# Altium PCB POWER_SUPPLY.PcbDoc (part 2 of 5)
Units mm, origin at the board's own origin, x right, y up, seen from the top; angles counter-clockwise.
Board outline 115 x 115 mm, 2 copper layers (Top Layer, Bottom Layer), stack 1.58 mm thick; 91 components, 48 nets, 207 pads, 26 vias.
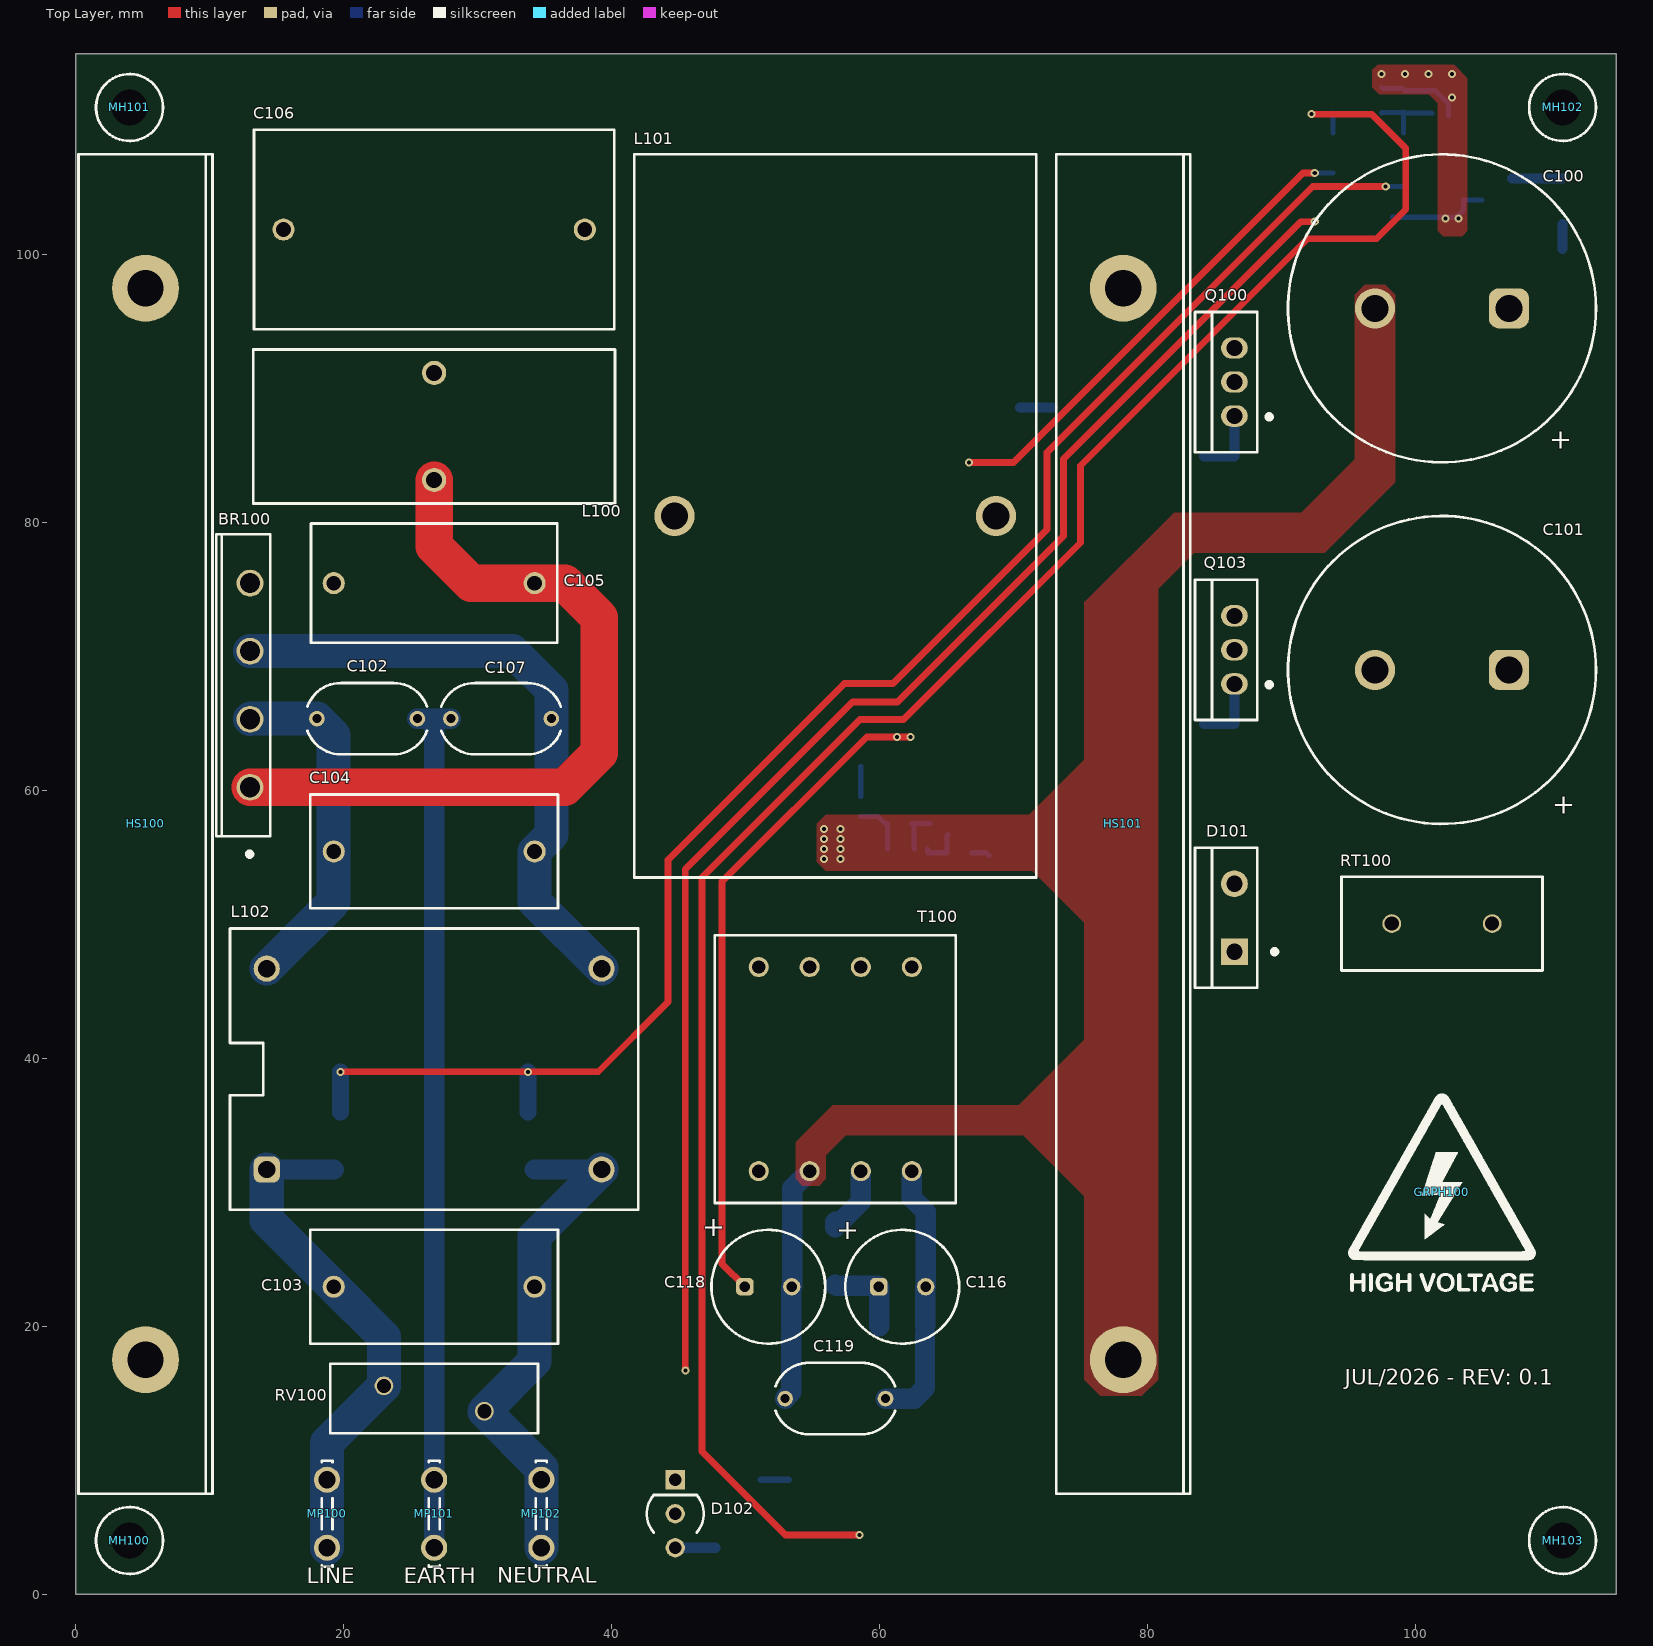
[diagram p0: Top Layer view]

## Part data (continued)
D101: "DIODE STD 600V 8A TO220AC INS", Average Rectified Current=8A, Case/Package=TO-220-2, Forward Voltage=2.4V, Manufacturer=STMicroelectronics, Max Forward Surge Current (Ifsm)=180A, Max Junction Temperature (Tj)=150°C, Max Repetitive Reverse Voltage (Vrrm)=600V, Min Operating Temperature=-65°C, Peak Reverse Current=10µA, Supplier Part Number=497-3250-5-ND, Category="Rectifier Diodes", China RoHS=Non-Compliant, ComponentLink1Description=https://datasheet.octopart.com:443/STTH806DTI-STMicroelectronics-datasheet-8805855.pdf?src-supplier=Newark, ComponentLink1URL=https://datasheet.octopart.com:443/STTH806DTI-STMicroelectronics-datasheet-8805855.pdf?src-supplier=Newark, ComponentLink2Description=https://datasheet.octopart.com:443/STTH806DTI-STMicroelectronics-datasheet-33008909.pdf?src-supplier=Farnell, ComponentLink2URL=https://datasheet.octopart.com:443/STTH806DTI-STMicroelectronics-datasheet-33008909.pdf?src-supplier=Farnell, ComponentLink3Description=https://datasheet.octopart.com:443/STTH806DTI-STMicroelectronics-datasheet-148320.pdf?src-supplier=Verical, ComponentLink3URL=https://datasheet.octopart.com:443/STTH806DTI-STMicroelectronics-datasheet-148320.pdf?src-supplier=Verical, ComponentLink4Description=https://datasheet.octopart.com:443/STTH806DTI-STMicroelectronics-datasheet-68141.pdf?src-supplier=Mouser, ComponentLink4URL=https://datasheet.octopart.com:443/STTH806DTI-STMicroelectronics-datasheet-68141.pdf?src-supplier=Mouser, ComponentLink5Description=https://datasheet.octopart.com:443/STTH806DTI-STMicroelectronics-datasheet-14054847.pdf?src-supplier=iiiC, ComponentLink5URL=https://datasheet.octopart.com:443/STTH806DTI-STMicroelectronics-datasheet-14054847.pdf?src-supplier=iiiC, Country of Origin="Mainland China", Current Rating=8A, Element Configuration=Single, Export Control Classification Number (ECCN) Code=EAR99, Forward Current=8A, Harmonized Tariff Schedule (HTS) Code=8541.10.00.80, Height=9.3mm, Introduction Date=1980-01-04, Lead Free="Lead Free", Length=10.4mm, Lifecycle Status=Production, Manufacturer Part Number=STTH806DTI, Max Operating Temperature=150°C, Max Output current=8A, Max Reverse Voltage (DC)=600V, Max Surge Current=180A, Mounting Technology="Through Hole", Number of Elements=1, Number of Terminals=2, Output Current=8A, Peak Non-Repetitive Surge Current=180A, Pins=2, Polarity=Standard, Pricing="1=2.08, 50=0.861, 100=0.8408, 500=0.78042, 1000=0.74288 (USD)", Radiation Hardening=No, REACH SVHC=No, Recovery Time=30ns, Reverse Recovery Time=30ns, Reverse Standoff Voltage=600V, Reverse Voltage=600V, RoHS=Compliant, Stock=1037, Supplier=DigiKey, Voltage Rating (DC)=600V, Width=4.6mm
D102: library part SSL-LX3059IGW-CA, "LED GREEN/RED DIFF T-3MM TRI T/H", Case/Package=Radial, Color="Green, Red", Forward Current=30mA, Forward Voltage=2.2V, Manufacturer=Lumex, Max Operating Temperature=85°C, Min Operating Temperature=-40°C, Power Dissipation=105mW, Reverse Voltage=5V, Supplier Part Number=67-2307-ND, Category=LEDs, China RoHS=Compliant, ComponentLink1Description=https://datasheet.octopart.com:443/SSL-LX3059IGW-CA-Lumex-datasheet-158669.pdf?src-supplier=IHS, ComponentLink1URL=https://datasheet.octopart.com:443/SSL-LX3059IGW-CA-Lumex-datasheet-158669.pdf?src-supplier=IHS, ComponentLink2Description=https://datasheet.octopart.com:443/SSL-LX3059IGW-CA-Lumex-datasheet-12552074.pdf?src-supplier=Future+Electronics, ComponentLink2URL=https://datasheet.octopart.com:443/SSL-LX3059IGW-CA-Lumex-datasheet-12552074.pdf?src-supplier=Future+Electronics, Country of Origin="Mainland China", Export Control Classification Number (ECCN) Code=EAR99, Harmonized Tariff Schedule (HTS) Code=8541.40.20.00, Height=5mm, Illumination Color="Green, Red", Introduction Date=2001-01-30, Lead Free="Lead Free", Lens Style="Colorless, Diffused, Dome", Lifecycle Status=Production, Luminous Intensity=30mcd, Manufacturer Part Number=SSL-LX3059IGW-CA, Mounting Technology="Through Hole", Number of Circuits=1, Number of LEDs=2, Number of Terminals=3, Packaging=Bulk, Pins=3, Pricing="1=0.53, 10=0.365, 100=0.2624, 500=0.21602, 1000=0.20076, 2000=0.18779, 5000=0.17358, 10000=0.16471, 25000=0.15504 (USD)", REACH SVHC=Yes, RoHS=Compliant, Schedule B="8541402000, 8541402000|8541402000, 8541402000|8541402000|8541402000, 8541402000|8541402000|8541402000|8541402000", Shape=Round, Stock=91547, Supplier=DigiKey, Terminal Pitch=2.54mm, Viewing Angle=60°, Wavelength=635nm
D103 D104: "DIODE STANDARD 1000V 1A DO214AC", Average Rectified Current=1A, Case/Package=SMA, Forward Voltage=1.1V, Manufacturer=onsemi, Manufacturer Lifecycle Status=ACTIVE, Max Forward Surge Current (Ifsm)=30A, Max Junction Temperature (Tj)=150°C, Max Power Dissipation=1.4W, Max Repetitive Reverse Voltage (Vrrm)=1kV, Max Surge Current=40A, Min Operating Temperature=-55°C, Peak Reverse Current=1µA, Supplier Part Number=S1MFSCT-ND, Category="Rectifier Diodes", China RoHS=Non-Compliant, ComponentLink1Description=https://datasheet.octopart.com:443/S1M-ON-Semiconductor-datasheet-137256442.pdf?src-supplier=Upverter, ComponentLink1URL=https://datasheet.octopart.com:443/S1M-ON-Semiconductor-datasheet-137256442.pdf?src-supplier=Upverter, ComponentLink2Description=https://sigma.octopart.com:443/138897407/technical_drawing/ON-Semiconductor-S1M.pdf?src-supplier=Upverter, ComponentLink2URL=https://sigma.octopart.com:443/138897407/technical_drawing/ON-Semiconductor-S1M.pdf?src-supplier=Upverter, ComponentLink3Description=https://datasheet.octopart.com:443/S1M-ON-Semiconductor-datasheet-155242966.pdf?src-supplier=onsemi, ComponentLink3URL=https://datasheet.octopart.com:443/S1M-ON-Semiconductor-datasheet-155242966.pdf?src-supplier=onsemi, ComponentLink4Description=https://datasheet.octopart.com:443/S1M-ON-Semiconductor-datasheet-81638276.pdf?src-supplier=onsemi, ComponentLink4URL=https://datasheet.octopart.com:443/S1M-ON-Semiconductor-datasheet-81638276.pdf?src-supplier=onsemi, ComponentLink5Description=https://datasheet.octopart.com:443/S1M-ON-Semiconductor-datasheet-86698603.pdf?src-supplier=onsemi, ComponentLink5URL=https://datasheet.octopart.com:443/S1M-ON-Semiconductor-datasheet-86698603.pdf?src-supplier=onsemi, ComponentLink6Description=https://datasheet.octopart.com:443/S1M-ON-Semiconductor-datasheet-21199496.pdf?src-supplier=Future+Electronics, ComponentLink6URL=https://datasheet.octopart.com:443/S1M-ON-Semiconductor-datasheet-21199496.pdf?src-supplier=Future+Electronics, ComponentLink7Description=https://datasheet.octopart.com:443/S1M-Fairchild-Semiconductor-datasheet-42431463.pdf?src-supplier=IHS, ComponentLink7URL=https://datasheet.octopart.com:443/S1M-Fairchild-Semiconductor-datasheet-42431463.pdf?src-supplier=IHS, ComponentLink8Description=https://datasheet.octopart.com:443/S1M-onsemi-datasheet-180969538.pdf?src-supplier=IHS, ComponentLink8URL=https://datasheet.octopart.com:443/S1M-onsemi-datasheet-180969538.pdf?src-supplier=IHS, ComponentLink9Description=https://datasheet.octopart.com:443/S1M-onsemi-datasheet-181265944.pdf?src-supplier=IHS, ComponentLink9URL=https://datasheet.octopart.com:443/S1M-onsemi-datasheet-181265944.pdf?src-supplier=IHS, ComponentLink10Description=https://datasheet.octopart.com:443/S1M-ON-Semiconductor-datasheet-86692978.pdf?src-supplier=Farnell, ComponentLink10URL=https://datasheet.octopart.com:443/S1M-ON-Semiconductor-datasheet-86692978.pdf?src-supplier=Farnell, ComponentLink11Description=https://datasheet.octopart.com:443/S1M-Fairchild-Semiconductor-datasheet-68341913.pdf?src-supplier=Farnell, ComponentLink11URL=https://datasheet.octopart.com:443/S1M-Fairchild-Semiconductor-datasheet-68341913.pdf?src-supplier=Farnell, ComponentLink12Description=https://datasheet.octopart.com:443/S1M.-Fairchild-Semiconductor-datasheet-2355.pdf?src-supplier=Fairchild+Semiconductor, ComponentLink12URL=https://datasheet.octopart.com:443/S1M.-Fairchild-Semiconductor-datasheet-2355.pdf?src-supplier=Fairchild+Semiconductor, ComponentLink13Description=https://sigma.octopart.com:443/17345279/technical_drawing/Fairchild-Semiconductor-S1M..pdf?src-supplier=Fairchild+Semiconductor, ComponentLink13URL=https://sigma.octopart.com:443/17345279/technical_drawing/Fairchild-Semiconductor-S1M..pdf?src-supplier=Fairchild+Semiconductor, ComponentLink14Description=https://datasheet.octopart.com:443/S1M-Fairchild-Semiconductor-datasheet-67132006.pdf?src-supplier=element14+APAC, ComponentLink14URL=https://datasheet.octopart.com:443/S1M-Fairchild-Semiconductor-datasheet-67132006.pdf?src-supplier=element14+APAC, ComponentLink15Description=https://datasheet.octopart.com:443/S1M-Fairchild-Semiconductor-datasheet-68457125.pdf?src-supplier=element14+APAC, ComponentLink15URL=https://datasheet.octopart.com:443/S1M-Fairchild-Semiconductor-datasheet-68457125.pdf?src-supplier=element14+APAC, ComponentLink16Description=https://datasheet.octopart.com:443/S1M.-Fairchild-Semiconductor-datasheet-8621163.pdf?src-supplier=_legacy+Avnet, ComponentLink16URL=https://datasheet.octopart.com:443/S1M.-Fairchild-Semiconductor-datasheet-8621163.pdf?src-supplier=_legacy+Avnet, ComponentLink17Description=https://datasheet.octopart.com:443/S1M.-Fairchild-Semiconductor-datasheet-17703433.pdf?src-supplier=Jameco, ComponentLink17URL=https://datasheet.octopart.com:443/S1M.-Fairchild-Semiconductor-datasheet-17703433.pdf?src-supplier=Jameco, ComponentLink18Description=https://datasheet.octopart.com:443/S1M-ON-Semiconductor-datasheet-81455056.pdf?src-supplier=TME, ComponentLink18URL=https://datasheet.octopart.com:443/S1M-ON-Semiconductor-datasheet-81455056.pdf?src-supplier=TME, ComponentLink19Description=https://datasheet.octopart.com:443/S1M-Fairchild-Semiconductor-datasheet-67356299.pdf?src-supplier=Newark, ComponentLink19URL=https://datasheet.octopart.com:443/S1M-Fairchild-Semiconductor-datasheet-67356299.pdf?src-supplier=Newark, ComponentLink20Description=https://datasheet.octopart.com:443/S1M-Fairchild-Semiconductor-datasheet-67650218.pdf?src-supplier=Newark, ComponentLink20URL=https://datasheet.octopart.com:443/S1M-Fairchild-Semiconductor-datasheet-67650218.pdf?src-supplier=Newark, ComponentLink21Description=http://sigma.octopart.com:80/150631121/rohs_statement/ON-Semiconductor-S1M.pdf?src-supplier=Compliance+Statements, ComponentLink21URL=http://sigma.octopart.com:80/150631121/rohs_statement/ON-Semiconductor-S1M.pdf?src-supplier=Compliance+Statements, ComponentLink22Description=http://sigma.octopart.com:80/17356692/reach_statement/Fairchild-Semiconductor-S1M..pdf?src-supplier=Compliance+Statements, ComponentLink22URL=http://sigma.octopart.com:80/17356692/reach_statement/Fairchild-Semiconductor-S1M..pdf?src-supplier=Compliance+Statements, ComponentLink23Description=http://sigma.octopart.com:80/17356693/materials_sheet/Fairchild-Semiconductor-S1M..pdf?src-supplier=Compliance+Statements, ComponentLink23URL=http://sigma.octopart.com:80/17356693/materials_sheet/Fairchild-Semiconductor-S1M..pdf?src-supplier=Compliance+Statements, ComponentLink24Description=http://sigma.octopart.com:80/33320135/reach_statement/Fairchild-Semiconductor-S1M..pdf?src-supplier=Compliance+Statements, ComponentLink24URL=http://sigma.octopart.com:80/33320135/reach_statement/Fairchild-Semiconductor-S1M..pdf?src-supplier=Compliance+Statements, ComponentLink25Description=http://sigma.octopart.com:80/33320136/materials_sheet/Fairchild-Semiconductor-S1M..pdf?src-supplier=Compliance+Statements, ComponentLink25URL=http://sigma.octopart.com:80/33320136/materials_sheet/Fairchild-Semiconductor-S1M..pdf?src-supplier=Compliance+Statements, ComponentLink26Description=http://sigma.octopart.com:80/reach_statement/ON-Semiconductor-company-79.pdf?src-supplier=Compliance+Statements, ComponentLink26URL=http://sigma.octopart.com:80/reach_statement/ON-Semiconductor-company-79.pdf?src-supplier=Compliance+Statements, ComponentLink27Description=http://sigma.octopart.com:80/rohs_statement/Fairchild-Semiconductor-company-11.pdf?src-supplier=Compliance+Statements, ComponentLink27URL=http://sigma.octopart.com:80/rohs_statement/Fairchild-Semiconductor-company-11.pdf?src-supplier=Compliance+Statements, ComponentLink28Description=http://sigma.octopart.com:80/rohs_statement/Fairchild-Semiconductor-company-10.pdf?src-supplier=Compliance+Statements, ComponentLink28URL=http://sigma.octopart.com:80/rohs_statement/Fairchild-Semiconductor-company-10.pdf?src-supplier=Compliance+Statements, ComponentLink29Description=http://sigma.octopart.com:80/reach_statement/Fairchild-Semiconductor-company-9.pdf?src-supplier=Compliance+Statements, ComponentLink29URL=http://sigma.octopart.com:80/reach_statement/Fairchild-Semiconductor-company-9.pdf?src-supplier=Compliance+Statements, ComponentLink30Description=https://octopart.com:443/opatz8j6/c1?t=n0SYjiZlka3r_Whlk6gXIPX58mX80-n1vomPl2TG4z1fmHuDBzJKwyqg0bRS_4_XgLdcmSYjtJgP_S5mZQILugFSHa93LL7cl5mwZrLdnYtNflzAqzuffqGNZZyCt7vmMSprHK16RecS2jkpkmbcKzWpRC-zUDtILVzj4gQyF_6qaHjtw7EcDuvb_Pqugyx8-8PKuYTRhJBhClgZk4_j75mz1q3ION-T6ibt9jV_FR2Qv5awSqFahmOuSekWtuxMqhRyD7MQcT7sPZCY191pJxk_FLAcfSSI_usOZnCXK2S15LESivvIV5SYtc3Ge4IvssPd_cTjsfGelDwlt0s_lh60Q-SArnY&src-supplier=Compliance+Statements, ComponentLink30URL=https://octopart.com:443/opatz8j6/c1?t=n0SYjiZlka3r_Whlk6gXIPX58mX80-n1vomPl2TG4z1fmHuDBzJKwyqg0bRS_4_XgLdcmSYjtJgP_S5mZQILugFSHa93LL7cl5mwZrLdnYtNflzAqzuffqGNZZyCt7vmMSprHK16RecS2jkpkmbcKzWpRC-zUDtILVzj4gQyF_6qaHjtw7EcDuvb_Pqugyx8-8PKuYTRhJBhClgZk4_j75mz1q3ION-T6ibt9jV_FR2Qv5awSqFahmOuSekWtuxMqhRyD7MQcT7sPZCY191pJxk_FLAcfSSI_usOZnCXK2S15LESivvIV5SYtc3Ge4IvssPd_cTjsfGelDwlt0s_lh60Q-SArnY&src-supplier=Compliance+Statements, ComponentLink31Description=https://octopart.com:443/opatz8j6/c1?t=9fN0xKxbvStzNDh-gT9V40Na1GFOKEqKEBKH0IzsOCdv-WrCDdU7NVt0a5jZpiM1-aUJRxbFJKQDoYXMAClQF-f-1JqdenA_zdjQropmCM7beD1ITlapi5La6F33tE-IyjPnPcQIRL5uGwYRF9lpX15cfc3_OeTxqVXYipX20js4p8k2WjlpPeTkKjpvacNtXs9clp1R-cp7RgURPYMTP6YYwA3pmboRfav4WWRbmUlnCD1W-zMoPXKmI0MdEDtAmP_dGOGCyP1r-vjGLjO6lhbJ5P6FsJbgS3Y09FlgP2FWqkGjad36MZBYWWMK04h6aXLJYVEO4CTOUJN6AMYU8J3gUKidxQ&src-supplier=Compliance+Statements, ComponentLink31URL=https://octopart.com:443/opatz8j6/c1?t=9fN0xKxbvStzNDh-gT9V40Na1GFOKEqKEBKH0IzsOCdv-WrCDdU7NVt0a5jZpiM1-aUJRxbFJKQDoYXMAClQF-f-1JqdenA_zdjQropmCM7beD1ITlapi5La6F33tE-IyjPnPcQIRL5uGwYRF9lpX15cfc3_OeTxqVXYipX20js4p8k2WjlpPeTkKjpvacNtXs9clp1R-cp7RgURPYMTP6YYwA3pmboRfav4WWRbmUlnCD1W-zMoPXKmI0MdEDtAmP_dGOGCyP1r-vjGLjO6lhbJ5P6FsJbgS3Y09FlgP2FWqkGjad36MZBYWWMK04h6aXLJYVEO4CTOUJN6AMYU8J3gUKidxQ&src-supplier=Compliance+Statements, Contact Plating=Tin, Country of Origin="Mainland China", Current=1A, Current Rating=1A, Element Configuration=Single, Export Control Classification Number (ECCN) Code=EAR99, Forward Current=1A, Harmonized Tariff Schedule (HTS) Code=8541.10.00.80, Height=2.5mm, Introduction Date=1998-06-01, Lead Free="Lead Free", Length=4.75mm, Lifecycle Status=Production, Manufacturer Part Number=S1M, Max Operating Temperature=150°C, Max Output current=1A, Max Reverse Voltage (DC)=1kV, Mounting Technology="Surface Mount", Number of Elements=1, Number of Terminals=2, Output Current=1A, Packaging="Cut Tape", Peak Non-Repetitive Surge Current=30A, Pins=2, Polarity=Standard, Power Dissipation=1.4W, Pricing="1=0.23, 10=0.156, 100=0.1216, 500=0.08984, 1000=0.077, 2000=0.07091 (USD)", Radiation Hardening=No, REACH SVHC=No, Recovery Time=1.8µs, Reverse Recovery Time=1.8µs, Reverse Standoff Voltage=1kV, Reverse Voltage=1kV, RoHS=Compliant, Schedule B="8541100080, 8541100080|8541100080, 8541100080|8541100080|8541100080, 8541100080|8541100080|8541100080|8541100080", Stock=295300, Supplier=DigiKey, Termination=SMD/SMT, Voltage=1kV, Voltage Rating (DC)=1kV, Width=5.28mm
D105 D106 D111: "DIODE STANDARD 100V 200MA SOD80", Average Rectified Current=200mA, Current=2A, Forward Voltage=1V, Manufacturer=onsemi, Manufacturer Lifecycle Status=ACTIVE, Max Operating Temperature=175°C, Max Power Dissipation=500mW, Max Repetitive Reverse Voltage (Vrrm)=100V, Min Operating Temperature=-55°C, Peak Reverse Current=25nA, Supplier Part Number=LL4148FSCT-ND, Body Material=Glass, Category="Rectifier Diodes", China RoHS=Non-Compliant, ComponentLink1Description=https://datasheet.octopart.com:443/LL4148-onsemi-datasheet-158584874.pdf?src-supplier=onsemi, ComponentLink1URL=https://datasheet.octopart.com:443/LL4148-onsemi-datasheet-158584874.pdf?src-supplier=onsemi, ComponentLink2Description=https://datasheet.octopart.com:443/LL4148-ON-Semiconductor-datasheet-85572496.pdf?src-supplier=onsemi, ComponentLink2URL=https://datasheet.octopart.com:443/LL4148-ON-Semiconductor-datasheet-85572496.pdf?src-supplier=onsemi, ComponentLink3Description=https://datasheet.octopart.com:443/LL4148-ON-Semiconductor-datasheet-86697764.pdf?src-supplier=onsemi, ComponentLink3URL=https://datasheet.octopart.com:443/LL4148-ON-Semiconductor-datasheet-86697764.pdf?src-supplier=onsemi, ComponentLink4Description=https://datasheet.octopart.com:443/LL4148-ON-Semiconductor-datasheet-17172799.pdf?src-supplier=element14+APAC, ComponentLink4URL=https://datasheet.octopart.com:443/LL4148-ON-Semiconductor-datasheet-17172799.pdf?src-supplier=element14+APAC, ComponentLink5Description=https://datasheet.octopart.com:443/LL4148-ON-Semiconductor-datasheet-86691521.pdf?src-supplier=element14+APAC, ComponentLink5URL=https://datasheet.octopart.com:443/LL4148-ON-Semiconductor-datasheet-86691521.pdf?src-supplier=element14+APAC, ComponentLink6Description=https://datasheet.octopart.com:443/LL4148-Fairchild-Semiconductor-datasheet-38581097.pdf?src-supplier=element14+APAC, ComponentLink6URL=https://datasheet.octopart.com:443/LL4148-Fairchild-Semiconductor-datasheet-38581097.pdf?src-supplier=element14+APAC, ComponentLink7Description=https://datasheet.octopart.com:443/LL4148-Fairchild-Semiconductor-datasheet-62114946.pdf?src-supplier=element14+APAC, ComponentLink7URL=https://datasheet.octopart.com:443/LL4148-Fairchild-Semiconductor-datasheet-62114946.pdf?src-supplier=element14+APAC, ComponentLink8Description=https://datasheet.octopart.com:443/LL4148-Fairchild-Semiconductor-datasheet-62292353.pdf?src-supplier=element14+APAC, ComponentLink8URL=https://datasheet.octopart.com:443/LL4148-Fairchild-Semiconductor-datasheet-62292353.pdf?src-supplier=element14+APAC, ComponentLink9Description=https://datasheet.octopart.com:443/LL4148.-ON-Semiconductor-datasheet-87455466.pdf?src-supplier=element14+APAC, ComponentLink9URL=https://datasheet.octopart.com:443/LL4148.-ON-Semiconductor-datasheet-87455466.pdf?src-supplier=element14+APAC, ComponentLink10Description=https://datasheet.octopart.com:443/LL4148-ON-Semiconductor-datasheet-100088444.pdf?src-supplier=JRH+Electronics, ComponentLink10URL=https://datasheet.octopart.com:443/LL4148-ON-Semiconductor-datasheet-100088444.pdf?src-supplier=JRH+Electronics, ComponentLink11Description=https://datasheet.octopart.com:443/LL4148-onsemi-datasheet-180961323.pdf?src-supplier=IHS, ComponentLink11URL=https://datasheet.octopart.com:443/LL4148-onsemi-datasheet-180961323.pdf?src-supplier=IHS, ComponentLink12Description=https://datasheet.octopart.com:443/LL4148-Fairchild-Semiconductor-datasheet-182297807.pdf?src-supplier=IHS, ComponentLink12URL=https://datasheet.octopart.com:443/LL4148-Fairchild-Semiconductor-datasheet-182297807.pdf?src-supplier=IHS, ComponentLink13Description=https://datasheet.octopart.com:443/LL4148-Fairchild-datasheet-492438.pdf?src-supplier=Fairchild+Semiconductor, ComponentLink13URL=https://datasheet.octopart.com:443/LL4148-Fairchild-datasheet-492438.pdf?src-supplier=Fairchild+Semiconductor, ComponentLink14Description=https://datasheet.octopart.com:443/LL4148-Fairchild-Semiconductor-datasheet-11045226.pdf?src-supplier=Fairchild+Semiconductor, ComponentLink14URL=https://datasheet.octopart.com:443/LL4148-Fairchild-Semiconductor-datasheet-11045226.pdf?src-supplier=Fairchild+Semiconductor, ComponentLink15Description=https://sigma.octopart.com:443/17344539/technical_drawing/Fairchild-Semiconductor-LL4148.pdf?src-supplier=Fairchild+Semiconductor, ComponentLink15URL=https://sigma.octopart.com:443/17344539/technical_drawing/Fairchild-Semiconductor-LL4148.pdf?src-supplier=Fairchild+Semiconductor, ComponentLink16Description=https://datasheet.octopart.com:443/LL4148-Fairchild-Semiconductor-datasheet-14041796.pdf?src-supplier=iiiC, ComponentLink16URL=https://datasheet.octopart.com:443/LL4148-Fairchild-Semiconductor-datasheet-14041796.pdf?src-supplier=iiiC, ComponentLink17Description=https://datasheet.octopart.com:443/LL4148-Fairchild-Semiconductor-datasheet-10438456.pdf?src-supplier=Jameco, ComponentLink17URL=https://datasheet.octopart.com:443/LL4148-Fairchild-Semiconductor-datasheet-10438456.pdf?src-supplier=Jameco, ComponentLink18Description=https://datasheet.octopart.com:443/LL4148-ON-Semiconductor-datasheet-81454985.pdf?src-supplier=TME, ComponentLink18URL=https://datasheet.octopart.com:443/LL4148-ON-Semiconductor-datasheet-81454985.pdf?src-supplier=TME, ComponentLink19Description=https://datasheet.octopart.com:443/LL4148-Fairchild-Semiconductor-datasheet-62139678.pdf?src-supplier=iodParts+Technologies+Inc., ComponentLink19URL=https://datasheet.octopart.com:443/LL4148-Fairchild-Semiconductor-datasheet-62139678.pdf?src-supplier=iodParts+Technologies+Inc., ComponentLink20Description=https://datasheet.octopart.com:443/LL4148-Fairchild-Semiconductor-datasheet-62268912.pdf?src-supplier=Newark, ComponentLink20URL=https://datasheet.octopart.com:443/LL4148-Fairchild-Semiconductor-datasheet-62268912.pdf?src-supplier=Newark, ComponentLink21Description=http://sigma.octopart.com:80/150613095/rohs_statement/ON-Semiconductor-LL4148.pdf?src-supplier=Compliance+Statements, ComponentLink21URL=http://sigma.octopart.com:80/150613095/rohs_statement/ON-Semiconductor-LL4148.pdf?src-supplier=Compliance+Statements, ComponentLink22Description=http://sigma.octopart.com:80/17353531/reach_statement/Fairchild-Semiconductor-LL4148.pdf?src-supplier=Compliance+Statements, ComponentLink22URL=http://sigma.octopart.com:80/17353531/reach_statement/Fairchild-Semiconductor-LL4148.pdf?src-supplier=Compliance+Statements, ComponentLink23Description=http://sigma.octopart.com:80/17353532/materials_sheet/Fairchild-Semiconductor-LL4148.pdf?src-supplier=Compliance+Statements, ComponentLink23URL=http://sigma.octopart.com:80/17353532/materials_sheet/Fairchild-Semiconductor-LL4148.pdf?src-supplier=Compliance+Statements, ComponentLink24Description=http://sigma.octopart.com:80/33193297/reach_statement/Fairchild-Semiconductor-LL4148.pdf?src-supplier=Compliance+Statements, ComponentLink24URL=http://sigma.octopart.com:80/33193297/reach_statement/Fairchild-Semiconductor-LL4148.pdf?src-supplier=Compliance+Statements, ComponentLink25Description=http://sigma.octopart.com:80/33193298/materials_sheet/Fairchild-Semiconductor-LL4148.pdf?src-supplier=Compliance+Statements, ComponentLink25URL=http://sigma.octopart.com:80/33193298/materials_sheet/Fairchild-Semiconductor-LL4148.pdf?src-supplier=Compliance+Statements, ComponentLink26Description=http://sigma.octopart.com:80/reach_statement/ON-Semiconductor-company-79.pdf?src-supplier=Compliance+Statements, ComponentLink26URL=http://sigma.octopart.com:80/reach_statement/ON-Semiconductor-company-79.pdf?src-supplier=Compliance+Statements, ComponentLink27Description=http://sigma.octopart.com:80/rohs_statement/Fairchild-Semiconductor-company-11.pdf?src-supplier=Compliance+Statements, ComponentLink27URL=http://sigma.octopart.com:80/rohs_statement/Fairchild-Semiconductor-company-11.pdf?src-supplier=Compliance+Statements, ComponentLink28Description=http://sigma.octopart.com:80/rohs_statement/Fairchild-Semiconductor-company-10.pdf?src-supplier=Compliance+Statements, ComponentLink28URL=http://sigma.octopart.com:80/rohs_statement/Fairchild-Semiconductor-company-10.pdf?src-supplier=Compliance+Statements, ComponentLink29Description=http://sigma.octopart.com:80/reach_statement/Fairchild-Semiconductor-company-9.pdf?src-supplier=Compliance+Statements, ComponentLink29URL=http://sigma.octopart.com:80/reach_statement/Fairchild-Semiconductor-company-9.pdf?src-supplier=Compliance+Statements, ComponentLink30Description=https://octopart.com:443/opatz8j6/c1?t=Xpxkz2NEgx4OvPA3Qtyl6iXlCaTO6Dx006tOayOQh8UpEakiw79qybXVjaLUkLdsDcwAhzZWzx4hsVWPp7VVSRUS2jTBS-XM3DH5FBRSfylGBMniz7AQVr_Q7R3Jx2l4jaOKMfh2pC0Sl6mKcG5iyxqYHFtscphSICSNicIjKzxGRZvfLlKmxXOW-H294Yk1x_cmMiAGYKmeAx8dFNplOshOoCdbbUeOktIk3E71qjxJoHCVKROfEgPEuVAOotDk7D3GLFhb0ONIF7lvGKCN4-I4pNAMnSjDC8dGdI9FUWqMmgWXOVngnCQl4h9fXjZD62hPSik3c7L-oytIjEzlRkn8LqxphGg_pA&src-supplier=Compliance+Statements, ComponentLink30URL=https://octopart.com:443/opatz8j6/c1?t=Xpxkz2NEgx4OvPA3Qtyl6iXlCaTO6Dx006tOayOQh8UpEakiw79qybXVjaLUkLdsDcwAhzZWzx4hsVWPp7VVSRUS2jTBS-XM3DH5FBRSfylGBMniz7AQVr_Q7R3Jx2l4jaOKMfh2pC0Sl6mKcG5iyxqYHFtscphSICSNicIjKzxGRZvfLlKmxXOW-H294Yk1x_cmMiAGYKmeAx8dFNplOshOoCdbbUeOktIk3E71qjxJoHCVKROfEgPEuVAOotDk7D3GLFhb0ONIF7lvGKCN4-I4pNAMnSjDC8dGdI9FUWqMmgWXOVngnCQl4h9fXjZD62hPSik3c7L-oytIjEzlRkn8LqxphGg_pA&src-supplier=Compliance+Statements, ComponentLink31Description=https://octopart.com:443/opatz8j6/c1?t=tFIoAttQBStIyOR12NpmeKiMmTe5SP8-8Xq4lkvK6p_Vq1o_9olfxB33t-2EuHG15KFq_ggm6QlYiEY221wMJCkD3umFHElGgHs0hHZS39-Qp2ZZRsupO9Hr1N3PAdDpe750FQU0XgmhgEwHMZn8Z3k5HuoWmRNpRKEnkRFrE0IXKj6CmvQTfQmsENA-D1Qdyo8uqC6uxEsjmMW0Z_q8gXSjLM0_5fRz8eR6DFUS172wwd2S-tXcH_fY0j82uyAjy2XTX7JZakjtcfcCauvyxulJf2m4Pvazm22R5r_wpz6eRhj7z7PQ5lP7HSMDztpbFG7UgPSC_-QkyDNCFsHVILyjtZbhab6GOQU&src-supplier=Compliance+Statements, ComponentLink31URL=https://octopart.com:443/opatz8j6/c1?t=tFIoAttQBStIyOR12NpmeKiMmTe5SP8-8Xq4lkvK6p_Vq1o_9olfxB33t-2EuHG15KFq_ggm6QlYiEY221wMJCkD3umFHElGgHs0hHZS39-Qp2ZZRsupO9Hr1N3PAdDpe750FQU0XgmhgEwHMZn8Z3k5HuoWmRNpRKEnkRFrE0IXKj6CmvQTfQmsENA-D1Qdyo8uqC6uxEsjmMW0Z_q8gXSjLM0_5fRz8eR6DFUS172wwd2S-tXcH_fY0j82uyAjy2XTX7JZakjtcfcCauvyxulJf2m4Pvazm22R5r_wpz6eRhj7z7PQ5lP7HSMDztpbFG7UgPSC_-QkyDNCFsHVILyjtZbhab6GOQU&src-supplier=Compliance+Statements, Contact Plating=Tin, Country of Origin="Mainland China", Element Configuration=Single, Export Control Classification Number (ECCN) Code=EAR99, Forward Current=200mA, Harmonized Tariff Schedule (HTS) Code=8541.10.00.70, Height=1.5mm, Introduction Date=2006-01-13, Lead Free="Lead Free", Length=3.6mm, Lifecycle Status=Production, Manufacturer Part Number=LL4148, Max Forward Surge Current (Ifsm)=2A, Max Output current=200mA, Max Reverse Voltage (DC)=100V, Max Surge Current=2A, Mounting Technology="Surface Mount", Number of Elements=1, Number of Terminals=2, Packaging="Cut Tape", Peak Non-Repetitive Surge Current=2A, Pins=2, Power Dissipation=500mW, Pricing="1=0.1, 10=0.05, 100=0.0426, 500=0.0307, 1000=0.02682 (USD)", Radiation Hardening=No, REACH SVHC=Yes, Recovery Time=4ns, Reverse Recovery Time=4ns, Reverse Standoff Voltage=100V, Reverse Voltage=100V, RoHS=Compliant, Schedule B="8541100070, 8541100070|8541100070, 8541100070|8541100070|8541100070, 8541100070|8541100070|8541100070|8541100070", Stock=985538, Supplier=DigiKey, Voltage=100V, Weight=4.535924g, Width=1.5mm
D107: library part ZMM18B, "DIODE ZENER 18V 500MW SOD80C", Manufacturer=Diotec, Manufacturer Lifecycle Status=ACTIVE, Max Operating Temperature=175°C, Max Power Dissipation=500mW, Min Operating Temperature=-50°C, Peak Reverse Current=100nA, Reference Voltage=18V, Reverse Standoff Voltage=13V, Supplier Part Number=4878-ZMM18B-ND, Voltage Tolerance=2%, Zener Current=5mA, Body Material=Glass, Category="Zener Diodes", ComponentLink1Description=https://datasheet.octopart.com:443/ZMM18B-Diotec-datasheet-168810322.pdf?src-supplier=IHS, ComponentLink1URL=https://datasheet.octopart.com:443/ZMM18B-Diotec-datasheet-168810322.pdf?src-supplier=IHS, ComponentLink2Description=https://datasheet.octopart.com:443/ZMM18B-Diotec-datasheet-20772213.pdf?src-supplier=Component+Distributors+Inc., ComponentLink2URL=https://datasheet.octopart.com:443/ZMM18B-Diotec-datasheet-20772213.pdf?src-supplier=Component+Distributors+Inc., ComponentLink3Description=https://datasheet.octopart.com:443/ZMM18B-Diotec-datasheet-113245526.pdf?src-supplier=TME, ComponentLink3URL=https://datasheet.octopart.com:443/ZMM18B-Diotec-datasheet-113245526.pdf?src-supplier=TME, ComponentLink4Description=https://datasheet.octopart.com:443/ZMM18B-Diotec-datasheet-177062540.pdf?src-supplier=Burklin+Elektronik, ComponentLink4URL=https://datasheet.octopart.com:443/ZMM18B-Diotec-datasheet-177062540.pdf?src-supplier=Burklin+Elektronik, Country of Origin="Mainland China", Export Control Classification Number (ECCN) Code=EAR99, Harmonized Tariff Schedule (HTS) Code=85411000, Impedance=50Ω, Introduction Date=2005-07-18, Lifecycle Status=Production, Manufacturer Part Number=ZMM18B, Number of Elements=1, Number of Terminals=2, Polarity=Unidirectional, Pricing="1=0.18, 10=0.108, 100=0.0823, 500=0.07154, 1000=0.042, 2500=0.04116 (USD)", REACH SVHC=Unknown, RoHS=Compliant, Stock=2500, Supplier=DigiKey, Weight=49mg
D108: "DIODE SCHOTTKY 40V 1A DO214AC", Average Rectified Current=1A, Case/Package=SMA, Forward Voltage=630mV, Manufacturer=STMicroelectronics, Max Forward Surge Current (Ifsm)=60A, Max Junction Temperature (Tj)=175°C, Max Operating Temperature=150°C, Max Repetitive Reverse Voltage (Vrrm)=40V, Max Reverse Leakage Current=35µA, Min Operating Temperature=-65°C, Peak Non-Repetitive Surge Current=50A, Supplier Part Number=497-3753-1-ND, Category="Schottky Diodes", China RoHS=Non-Compliant, ComponentLink1Description=https://datasheet.octopart.com:443/STPS1L40A-STMicroelectronics-datasheet-8130128.pdf?src-supplier=element14+APAC, ComponentLink1URL=https://datasheet.octopart.com:443/STPS1L40A-STMicroelectronics-datasheet-8130128.pdf?src-supplier=element14+APAC, ComponentLink2Description=https://datasheet.octopart.com:443/STPS1L40A-STMicroelectronics-datasheet-12555403.pdf?src-supplier=TME, ComponentLink2URL=https://datasheet.octopart.com:443/STPS1L40A-STMicroelectronics-datasheet-12555403.pdf?src-supplier=TME, ComponentLink3Description=https://datasheet.octopart.com:443/STPS1L40A-STMicroelectronics-datasheet-67360113.pdf?src-supplier=Future+Electronics, ComponentLink3URL=https://datasheet.octopart.com:443/STPS1L40A-STMicroelectronics-datasheet-67360113.pdf?src-supplier=Future+Electronics, ComponentLink4Description=https://datasheet.octopart.com:443/STPS1L40A-STMicroelectronics-datasheet-56319.pdf?src-supplier=Mouser, ComponentLink4URL=https://datasheet.octopart.com:443/STPS1L40A-STMicroelectronics-datasheet-56319.pdf?src-supplier=Mouser, ComponentLink5Description=https://datasheet.octopart.com:443/STPS1L40A-STMicroelectronics-datasheet-14054142.pdf?src-supplier=iiiC, ComponentLink5URL=https://datasheet.octopart.com:443/STPS1L40A-STMicroelectronics-datasheet-14054142.pdf?src-supplier=iiiC, Contact Plating=Tin, Country of Origin="Mainland China", Current Rating=1A, Element Configuration=Single, Export Control Classification Number (ECCN) Code=EAR99, Forward Current=1A, Harmonized Tariff Schedule (HTS) Code=8541.10.00.80, Height=2.45mm, Introduction Date=1980-01-04, Lead Free="Lead Free", Length=4.6mm, Lifecycle Status=Production, Manufacturer Part Number=STPS1L40A, Max Output current=1A, Max Reverse Voltage (DC)=40V, Max Surge Current=60A, Mounting Technology="Surface Mount", Number of Elements=1, Number of Terminals=2, Output Current=1A, Packaging="Tape and Reel", Peak Reverse Current=35µA, Pins=2, Polarity=Standard, Pricing="1=0.35, 10=0.215, 100=0.1573, 500=0.11722, 1000=0.09616, 2000=0.09305 (USD)", Radiation Hardening=No, REACH SVHC=No, Reverse Standoff Voltage=40V, RoHS=Compliant, Schedule B="8541100080, 8541100080|8541100080|8541100080|8541100080|8541100080", Stock=10115, Supplier=DigiKey, Termination=SMD/SMT, Voltage Rating (DC)=40V, Width=2.95mm
D109: "DIODE SCHOTTKY 150V 1A SMA", Average Rectified Current=1A, Case/Package=SMA, Forward Current=15A, Forward Voltage=670mV, Manufacturer=STMicroelectronics, Max Forward Surge Current (Ifsm)=50A, Max Junction Temperature (Tj)=175°C, Max Repetitive Reverse Voltage (Vrrm)=150V, Max Reverse Leakage Current=1µA, Min Operating Temperature=-65°C, Peak Non-Repetitive Surge Current=75A, Supplier Part Number=497-7545-1-ND, Category="Schottky Diodes", China RoHS=Non-Compliant, ComponentLink1Description=https://datasheet.octopart.com:443/STPS1150A-STMicroelectronics-datasheet-27708597.pdf?src-supplier=Future+Electronics, ComponentLink1URL=https://datasheet.octopart.com:443/STPS1150A-STMicroelectronics-datasheet-27708597.pdf?src-supplier=Future+Electronics, ComponentLink2Description=https://datasheet.octopart.com:443/STPS1150A-STMicroelectronics-datasheet-10542425.pdf?src-supplier=Newark, ComponentLink2URL=https://datasheet.octopart.com:443/STPS1150A-STMicroelectronics-datasheet-10542425.pdf?src-supplier=Newark, ComponentLink3Description=https://datasheet.octopart.com:443/STPS1150A-STMicroelectronics-datasheet-140377099.pdf?src-supplier=Newark, ComponentLink3URL=https://datasheet.octopart.com:443/STPS1150A-STMicroelectronics-datasheet-140377099.pdf?src-supplier=Newark, ComponentLink4Description=https://datasheet.octopart.com:443/STPS1150A-STMicroelectronics-datasheet-22975683.pdf?src-supplier=Farnell, ComponentLink4URL=https://datasheet.octopart.com:443/STPS1150A-STMicroelectronics-datasheet-22975683.pdf?src-supplier=Farnell, ComponentLink5Description=https://datasheet.octopart.com:443/STPS1150A-STMicroelectronics-datasheet-14054967.pdf?src-supplier=iiiC, ComponentLink5URL=https://datasheet.octopart.com:443/STPS1150A-STMicroelectronics-datasheet-14054967.pdf?src-supplier=iiiC, ComponentLink6Description=https://datasheet.octopart.com:443/STPS1150A-STMicroelectronics-datasheet-5321440.pdf?src-supplier=Nu+Horizons, ComponentLink6URL=https://datasheet.octopart.com:443/STPS1150A-STMicroelectronics-datasheet-5321440.pdf?src-supplier=Nu+Horizons, ComponentLink7Description=https://datasheet.octopart.com:443/STPS1150A-STMicroelectronics-datasheet-23158.pdf?src-supplier=Mouser, ComponentLink7URL=https://datasheet.octopart.com:443/STPS1150A-STMicroelectronics-datasheet-23158.pdf?src-supplier=Mouser, ComponentLink8Description=https://datasheet.octopart.com:443/STPS1150A-STMicroelectronics-datasheet-145393.pdf?src-supplier=DigiKey, ComponentLink8URL=https://datasheet.octopart.com:443/STPS1150A-STMicroelectronics-datasheet-145393.pdf?src-supplier=DigiKey, Contact Plating=Tin, Current Rating=1A, Element Configuration=Single, Height=2.65mm, Lead Free="Lead Free", Length=4.6mm, Lifecycle Status=Production, Manufacturer Part Number=STPS1150A, Max Operating Temperature=175°C, Max Output current=1A, Max Reverse Voltage (DC)=150V, Max Surge Current=50A, Mounting Technology="Surface Mount", Number of Elements=1, Number of Terminals=2, Output Current=1A, Packaging="Tape and Reel", Peak Reverse Current=1µA, Pins=2, Polarity=Standard, Pricing="1=0.4, 10=0.245, 100=0.1953, 500=0.14652, 1000=0.12693, 2000=0.11749 (USD)", Radiation Hardening=No, REACH SVHC=No, Reverse Standoff Voltage=150V, RoHS=Compliant, Schedule B="8541100080, 8541100080|8541100080|8541100080|8541100080|8541100080", Stock=42987, Supplier=DigiKey, Voltage Rating (DC)=150V, Width=2.95mm
D110: "DIODE STANDARD 600V 1A SMA", Average Rectified Current=1A, Case/Package=SMA, Forward Voltage=1.05V, Manufacturer=STMicroelectronics, Max Forward Surge Current (Ifsm)=20A, Max Junction Temperature (Tj)=175°C, Max Repetitive Reverse Voltage (Vrrm)=600V, Min Operating Temperature=-65°C, Peak Reverse Current=1µA, Supplier Part Number=497-3241-1-ND, Category="Rectifier Diodes", China RoHS=Non-Compliant, ComponentLink1Description=https://datasheet.octopart.com:443/STTH1L06A-STMicroelectronics-datasheet-10836133.pdf?src-supplier=element14+APAC, ComponentLink1URL=https://datasheet.octopart.com:443/STTH1L06A-STMicroelectronics-datasheet-10836133.pdf?src-supplier=element14+APAC, ComponentLink2Description=https://datasheet.octopart.com:443/STTH1L06A-STMicroelectronics-datasheet-12520326.pdf?src-supplier=TME, ComponentLink2URL=https://datasheet.octopart.com:443/STTH1L06A-STMicroelectronics-datasheet-12520326.pdf?src-supplier=TME, ComponentLink3Description=https://datasheet.octopart.com:443/STTH1L06A-STMicroelectronics-datasheet-40109.pdf?src-supplier=Verical, ComponentLink3URL=https://datasheet.octopart.com:443/STTH1L06A-STMicroelectronics-datasheet-40109.pdf?src-supplier=Verical, ComponentLink4Description=https://datasheet.octopart.com:443/STTH1L06A-STMicroelectronics-datasheet-14054160.pdf?src-supplier=iiiC, ComponentLink4URL=https://datasheet.octopart.com:443/STTH1L06A-STMicroelectronics-datasheet-14054160.pdf?src-supplier=iiiC, Contact Plating=Tin, Current Rating=1A, Element Configuration=Single, Forward Current=1A, Height=2.65mm, Lead Free="Lead Free", Length=4.6mm, Lifecycle Status=Production, Manufacturer Part Number=STTH1L06A, Max Operating Temperature=175°C, Max Output current=1A, Max Reverse Voltage (DC)=600V, Max Surge Current=20A, Mounting Technology="Surface Mount", Number of Elements=1, Number of Terminals=2, Output Current=1A, Packaging="Tape and Reel", Peak Non-Repetitive Surge Current=20A, Pins=2, Polarity=Standard, Pricing="1=0.2, 10=0.133, 100=0.1241, 500=0.11528, 1000=0.10642 (USD)", Radiation Hardening=No, REACH SVHC=No, Recovery Time=80ns, Reverse Recovery Time=80ns, Reverse Standoff Voltage=600V, Reverse Voltage=600V, RoHS=Compliant, Schedule B="8541100080, 8541100080|8541100080|8541100080|8541100080|8541100080", Stock=25378, Supplier=DigiKey, Voltage Rating (DC)=600V, Width=2.95mm
GRPH100: "GRAPHIC ICON"
HS100 HS101: library part GENERIC-HEATSINK-100X60X10MM, "GENERIC HEATSINK 100X60X10MM", Manufacturer=OEM, Manufacturer Part Number=None
JP100 JP101: library part JUMPER-TX-8P2X1P5MM-WHITE, "JUMPER SMD TX 8.2X1.5MM WHITE", Manufacturer=OEM, Manufacturer Part Number=None
L100: library part 7447070, "WE-FI THT Leaded Toroidal Line Choke, 100uH, 6A, 0.035Ohm", DC Resistance Max=0.035Ohm, Inductance=100uH, Manufacturer="Wurth Elektronik", Operating Temperature Max=105°C, Operating Temperature Min=-40°C, Rated Current=6A, Category="Filter Chokes", ComponentLink1Description="Website Link", ComponentLink1URL=https://www.we-online.com/redexpert/article/7447070?ad, ComponentLink2Description="Datasheet Link", ComponentLink2URL=https://www.we-online.com/redexpert/spec/7447070?ad, Height=25mm, Length=25mm, Manufacturer Part Number=7447070, Match Code=WE-FI, Mount="Through Hole", Packaging=Tray, Width=11.5mm
L101: library part MMTR014901, "FIXED IND 570UH 8.7A 65MOHM KOOL MU CORE", Manufacturer=Legrand, Manufacturer Part Number=MMTR014901, Supplier="Display Max Eletrônica"
L102: library part 7448256033, "WE-CMB Common Mode Power Line Choke, THT, Type XL, 3.3mH, 6A, 25mΩ", Case/Size Code="Type XL", DC Resistance Max=25mΩ, Insulation Test Voltage=1500VAC, Manufacturer="Wurth Elektronik", Operating Temperature Max=125°C, Operating Temperature Min=-40°C, Rated Current=6A, Rated Voltage (AC)=250V, Category="Common Mode Chokes", ComponentLink1Description="Website Link", ComponentLink1URL=https://www.we-online.com/redexpert/article/7448256033?ad, ComponentLink2Description="Datasheet Link", ComponentLink2URL=https://www.we-online.com/redexpert/spec/7448256033?ad, Height=35mm, Inductance=3.3mH, Length=30mm, Manufacturer Part Number=7448256033, Match Code=WE-CMB, Material=MnZn, Mount="Through Hole", Packaging=Carton, Width=21mm
MH100 MH101 MH102 MH103: library part MTH-2P5MM-UNPLATED, "UNPLATED MOUNTING HOLE WITH 2.5MM DIAMETER"
MP100 MP101 MP102: "WA-MTAB Mounting Tab, THT, Vertical, Male, Blade 6.35mm", Manufacturer="Wurth Elektronik", Operating Temperature Max=150°C, Operating Temperature Min=-55°C, Blade Design=6.35mm, Category="Mounting Tabs", ComponentLink1Description="Website Link", ComponentLink1URL=https://www.we-online.com/redexpert/article/7471287?ad, ComponentLink2Description="Datasheet Link", ComponentLink2URL=https://www.we-online.com/redexpert/spec/7471287?ad, Gender=Male, Manufacturer Part Number=7471287, Match Code=WA-MTAB, Mount="Through Hole", Orientation=Vertical, Packaging=Bag
Q100 Q103: "MOSFET N-CH 600V 18A TO220FP", Case/Package=TO-220-3, Continuous Drain Current (ID)=18A, Drain to Source Breakdown Voltage=600V, Drain to Source Resistance=190mΩ, Gate to Source Voltage (Vgs)=25V, Input Capacitance=1.06nF, Manufacturer=STMicroelectronics, Max Operating Temperature=150°C, Max Power Dissipation=30W, Min Operating Temperature=-55°C, Supplier Part Number=497-13577-5-ND, Category=MOSFETs, China RoHS=Non-Compliant, ComponentLink1Description=https://datasheet.octopart.com:443/STF24N60M2-STMicroelectronics-datasheet-62336145.pdf?src-supplier=Farnell, ComponentLink1URL=https://datasheet.octopart.com:443/STF24N60M2-STMicroelectronics-datasheet-62336145.pdf?src-supplier=Farnell, ComponentLink2Description=https://datasheet.octopart.com:443/STF24N60M2-STMicroelectronics-datasheet-16349054.pdf?src-supplier=Future+Electronics, ComponentLink2URL=https://datasheet.octopart.com:443/STF24N60M2-STMicroelectronics-datasheet-16349054.pdf?src-supplier=Future+Electronics, ComponentLink3Description=https://datasheet.octopart.com:443/STF24N60M2-STMicroelectronics-datasheet-62335173.pdf?src-supplier=TME, ComponentLink3URL=https://datasheet.octopart.com:443/STF24N60M2-STMicroelectronics-datasheet-62335173.pdf?src-supplier=TME, Country of Origin="Mainland China", Drain to Source Voltage (Vdss)=600V, Element Configuration=Single, Export Control Classification Number (ECCN) Code=EAR99, Fall Time=61ns, Height=16.4mm, Introduction Date=2013-01-14, Lead Free="Lead Free", Length=10.4mm, Lifecycle Status=Production, Manufacturer Part Number=STF24N60M2, Min Breakdown Voltage=600V, Mounting Technology="Through Hole", Number of Elements=1, Number of Terminals=3, Pins=3, Power Dissipation=30W, Pricing="1=3.33, 50=1.6716, 100=1.5103, 500=1.22756, 1000=1.13672, 2000=1.06037, 5000=1.05788 (USD)", Radiation Hardening=No, Rds On Max=190mΩ, REACH SVHC=No, Rise Time=9ns, RoHS=Compliant, Schedule B="8541290080, 8541290080|8541290080|8541290080|8541290080|8541290080|8541290080|8541290080|8541290080|8541290080|8541290080|8541290080|8541290080|8541290080|8541290080|8541290080|8541290080|8541290080|8541290080|8541290080|8541290080|8541290080|8541290080|8541290080|85", Stock=871, Supplier=DigiKey, Turn-Off Delay Time=60ns, Turn-On Delay Time=14ns, Width=4.6mm
Q101 Q102: "TRANS NPN 45V 0.5A SOT23-3", Case/Package=SOT-23-3, Clock Frequency=100MHz, Collector Base Voltage (VCBO)=50V, Collector Emitter Breakdown Voltage=45V, Continuous Collector Current=500mA, Emitter Base Voltage (VEBO)=5V, Manufacturer=onsemi, Manufacturer Lifecycle Status=ACTIVE, Max Operating Temperature=150°C, Max Power Dissipation=300mW, Min Operating Temperature=-55°C, Supplier Part Number=SBC817-40LT3GOSCT-ND, Category=BJTs, China RoHS=Compliant, Collector Emitter Voltage (VCEO)=45V, ComponentLink1Description=https://datasheet.octopart.com:443/SBC817-40LT3G-onsemi-datasheet-175914671.pdf?src-supplier=IHS, ComponentLink1URL=https://datasheet.octopart.com:443/SBC817-40LT3G-onsemi-datasheet-175914671.pdf?src-supplier=IHS, ComponentLink2Description=https://datasheet.octopart.com:443/SBC817-40LT3G-ON-Semiconductor-datasheet-11547464.pdf?src-supplier=Upverter, ComponentLink2URL=https://datasheet.octopart.com:443/SBC817-40LT3G-ON-Semiconductor-datasheet-11547464.pdf?src-supplier=Upverter, ComponentLink3Description=https://datasheet.octopart.com:443/SBC817-40LT3G-ON-Semiconductor-datasheet-78758879.pdf?src-supplier=Master+Electronics, ComponentLink3URL=https://datasheet.octopart.com:443/SBC817-40LT3G-ON-Semiconductor-datasheet-78758879.pdf?src-supplier=Master+Electronics, ComponentLink4Description=https://datasheet.octopart.com:443/SBC817-40LT3G-onsemi-datasheet-189132499.pdf?src-supplier=Master+Electronics, ComponentLink4URL=https://datasheet.octopart.com:443/SBC817-40LT3G-onsemi-datasheet-189132499.pdf?src-supplier=Master+Electronics, ComponentLink5Description=https://datasheet.octopart.com:443/SBC817-40LT3G-ON-Semiconductor-datasheet-8110464.pdf?src-supplier=onsemi, ComponentLink5URL=https://datasheet.octopart.com:443/SBC817-40LT3G-ON-Semiconductor-datasheet-8110464.pdf?src-supplier=onsemi, ComponentLink6Description=https://datasheet.octopart.com:443/SBC817-40LT3G-ON-Semiconductor-datasheet-6400296.pdf?src-supplier=onsemi, ComponentLink6URL=https://datasheet.octopart.com:443/SBC817-40LT3G-ON-Semiconductor-datasheet-6400296.pdf?src-supplier=onsemi, ComponentLink7Description=https://datasheet.octopart.com:443/SBC817-40LT3G-onsemi-datasheet-133521192.pdf?src-supplier=TME, ComponentLink7URL=https://datasheet.octopart.com:443/SBC817-40LT3G-onsemi-datasheet-133521192.pdf?src-supplier=TME, ComponentLink8Description=http://sigma.octopart.com:80/15540786/rohs_certificate/ON-Semiconductor-SBC817-40LT3G.pdf?src-supplier=Compliance+Statements, ComponentLink8URL=http://sigma.octopart.com:80/15540786/rohs_certificate/ON-Semiconductor-SBC817-40LT3G.pdf?src-supplier=Compliance+Statements, ComponentLink9Description=http://sigma.octopart.com:80/15684525/materials_sheet/ON-Semiconductor-SBC817-40LT3G.csv?src-supplier=Compliance+Statements, ComponentLink9URL=http://sigma.octopart.com:80/15684525/materials_sheet/ON-Semiconductor-SBC817-40LT3G.csv?src-supplier=Compliance+Statements, ComponentLink10Description=http://sigma.octopart.com:80/150631289/rohs_statement/ON-Semiconductor-SBC817-40LT3G.pdf?src-supplier=Compliance+Statements, ComponentLink10URL=http://sigma.octopart.com:80/150631289/rohs_statement/ON-Semiconductor-SBC817-40LT3G.pdf?src-supplier=Compliance+Statements, ComponentLink11Description=http://sigma.octopart.com:80/reach_statement/ON-Semiconductor-company-79.pdf?src-supplier=Compliance+Statements, ComponentLink11URL=http://sigma.octopart.com:80/reach_statement/ON-Semiconductor-company-79.pdf?src-supplier=Compliance+Statements, ComponentLink12Description=https://octopart.com:443/opatz8j6/c1?t=cEC30QwZsyb0x-FMX1jhecc8cj0lODbyQVaJL5I4EOudI-i4uiyo8QJe7x8WGpb_UfldyhXdI6wTsOpeJ5HWz7Kzleo1EiYpUhSwBawIenFlUCJsMQESd9nlIcVrbvWrabnb6HpXCtvxDkswRDKZDOG3MBWymJDy-mDPZ7u5UlptsX8-ONvWANeBowi-w7nz9iZWLyjqVoM_QTKEQgTILpDidA8CXVyMync_ukwLaadxciX7hbgDafM4N20bPQPEg7z2Sm1KwG15cEibpJqtQ1hKuQpn-edZc_o2ddvdnsTvT3gddPA_45tVxaNa9XWOJj00WFdTbgFSlU6TTFEybWVRRlK52823bHwN5uVZ-7M&src-supplier=Compliance+Statements, ComponentLink12URL=https://octopart.com:443/opatz8j6/c1?t=cEC30QwZsyb0x-FMX1jhecc8cj0lODbyQVaJL5I4EOudI-i4uiyo8QJe7x8WGpb_UfldyhXdI6wTsOpeJ5HWz7Kzleo1EiYpUhSwBawIenFlUCJsMQESd9nlIcVrbvWrabnb6HpXCtvxDkswRDKZDOG3MBWymJDy-mDPZ7u5UlptsX8-ONvWANeBowi-w7nz9iZWLyjqVoM_QTKEQgTILpDidA8CXVyMync_ukwLaadxciX7hbgDafM4N20bPQPEg7z2Sm1KwG15cEibpJqtQ1hKuQpn-edZc_o2ddvdnsTvT3gddPA_45tVxaNa9XWOJj00WFdTbgFSlU6TTFEybWVRRlK52823bHwN5uVZ-7M&src-supplier=Compliance+Statements, ComponentLink13Description=https://octopart.com:443/opatz8j6/c1?t=zgMoQUE-FAGizIL2uNADbP3CQfJXduVKNLOt0cT-C7XNOnl5EOgq1b4UVzb0SZjomH3a3CKF513mPEsnVuWFTldNModuoiOAROM-U7UMjU1TiA4JeYDoVNfia-psQDQPr2NtqLaOU9Ju06PrsXVFYjz3NjgsSVJa-5X9CcWQ1HPxPGGUjhKccWy9QJVPTcefUdorkFOZvdb3XFmpP_42jgzyR9ZUQAURqjwANTg96Z5ittV_NTML0IEyFPhh0jLh0am3ICJpb8VA9ph6AsqLc9j4fhdilqUiQTpG4UGLijUcgX0mpfEUR-9G0JRIiKjoFhJPWB3BEKd5JcwsK41biiNJ-0hjTcgtgsqlWYFFTPLS&src-supplier=Compliance+Statements, ComponentLink13URL=https://octopart.com:443/opatz8j6/c1?t=zgMoQUE-FAGizIL2uNADbP3CQfJXduVKNLOt0cT-C7XNOnl5EOgq1b4UVzb0SZjomH3a3CKF513mPEsnVuWFTldNModuoiOAROM-U7UMjU1TiA4JeYDoVNfia-psQDQPr2NtqLaOU9Ju06PrsXVFYjz3NjgsSVJa-5X9CcWQ1HPxPGGUjhKccWy9QJVPTcefUdorkFOZvdb3XFmpP_42jgzyR9ZUQAURqjwANTg96Z5ittV_NTML0IEyFPhh0jLh0am3ICJpb8VA9ph6AsqLc9j4fhdilqUiQTpG4UGLijUcgX0mpfEUR-9G0JRIiKjoFhJPWB3BEKd5JcwsK41biiNJ-0hjTcgtgsqlWYFFTPLS&src-supplier=Compliance+Statements, Country of Origin="Mainland China", Element Configuration=Single, Export Control Classification Number (ECCN) Code=EAR99, Frequency=100MHz, Halogen Free="Halogen Free", hFE Min=250, Introduction Date=1991-03-01, Lead Free="Lead Free", Lifecycle Status=Production, Manufacturer Part Number=SBC817-40LT3G, Max Breakdown Voltage=45V, Max Collector Current=500mA, Number of Elements=1, Number of Terminals=3, Packaging="Tape and Reel", Pins=3, Polarity=NPN, Power Dissipation=300mW, Pricing="1=0.24, 10=0.146, 100=0.0904, 500=0.06616, 1000=0.05829, 2000=0.05165, 5000=0.04443 (USD)", Radiation Hardening=No, REACH SVHC=Yes, RoHS=Compliant, Schedule B="8541210080, 8541210080|8541210080, 8541210080|8541210080|8541210080, 8541210080|8541210080|8541210080|8541210080", Stock=144045, Supplier=DigiKey, Transition Frequency=100MHz